# Altium PCB H16R7x.PcbDoc (part 2 of 2)
Units mil, origin at the board's own origin, x right, y up, seen from the top; angles counter-clockwise.
Board outline 2362.2 x 1363.78 mil, 2 copper layers (Top Layer, Bottom Layer); 49 components, 30 nets, 132 pads, 0 vias.
Unrouted connection lines stored in the file: 81.
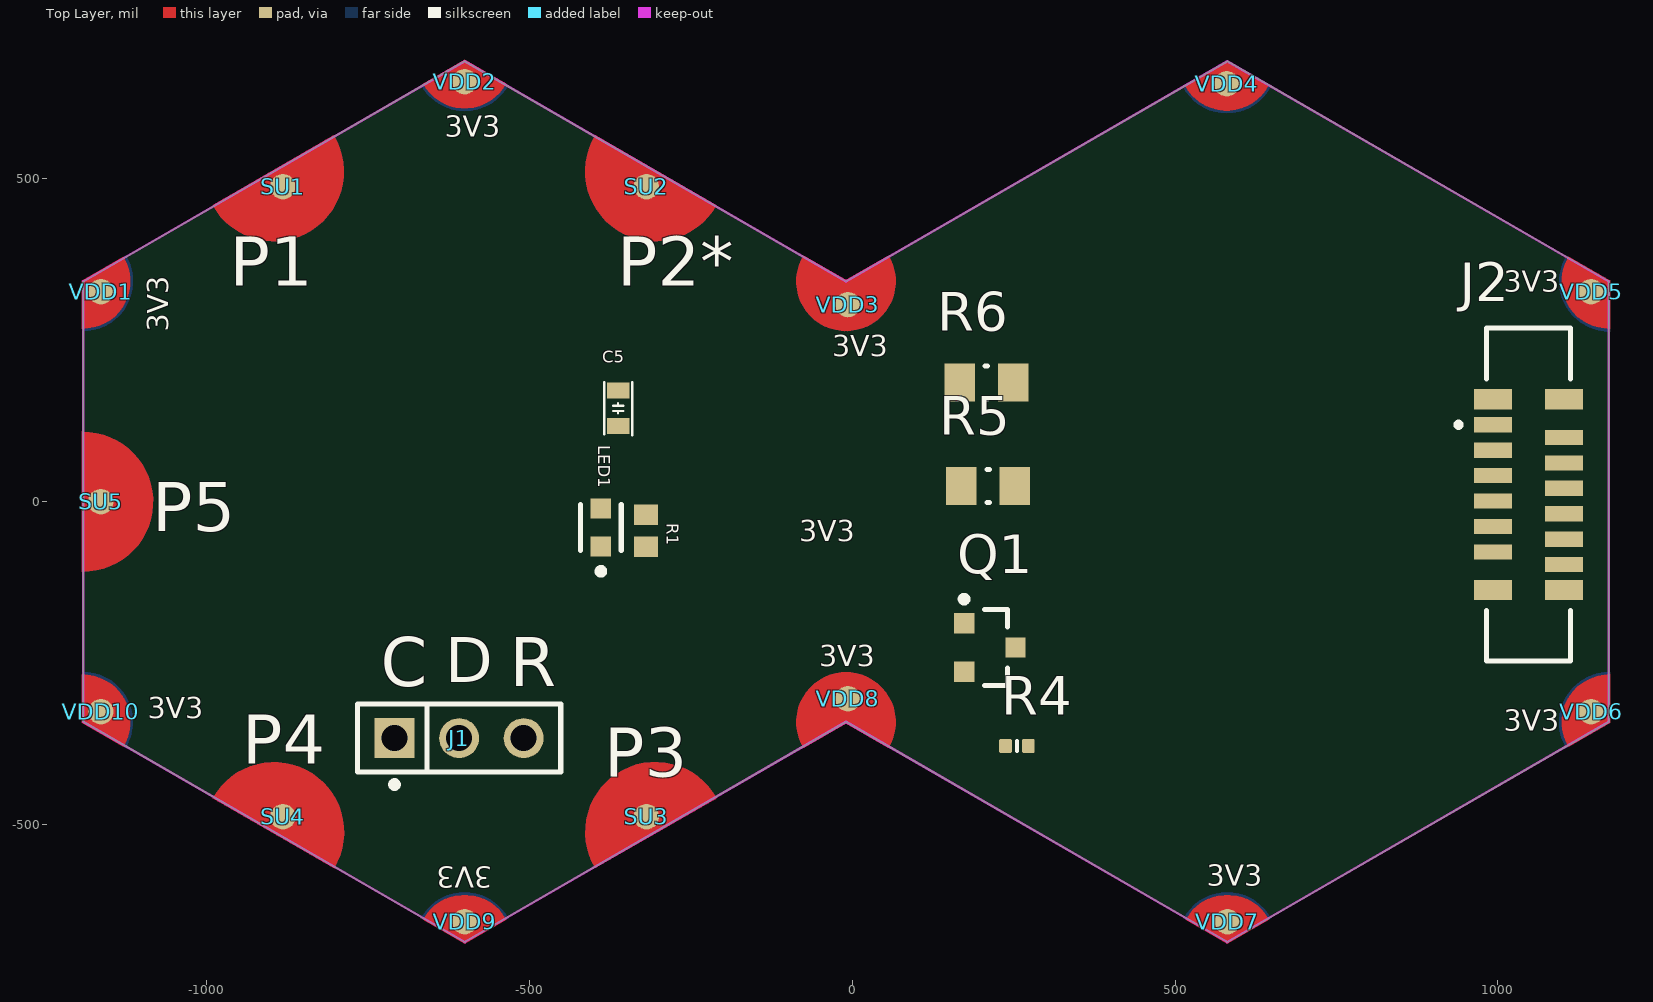
[diagram p0: Top Layer view]

## Part data (continued)
U1: "MCU 32-bit ARM Cortex M0+ RISC 512KB Flash 1.8V/2.5V/3.3V 48-Pin UFQFPN EP Tray", Manufacturer=STMicroelectronics, Supplier Part Number=497-STM32G0B1CEU6-ND, Category=Microcontrollers, Library=Hexabitz, Manufacturer Part Number=STM32G0B1CEU6, Pricing="1=4.78, 10=3.635, 25=3.3488, 100=3.0347, 260=2.87923, 520=2.7899, 1040=2.71638, 2600=2.63877 (USD)", RoHS=Yes, Stock=4305, Supplier=Digikey, Supplier 1=Digikey, Supplier Part Number 1=497-STM32G0B1CEU6-ND
VDD1 VDD2 VDD4 VDD5 VDD6 VDD7 VDD9 VDD10: library part HEXABIT_POWER_PORT_U
VDD3: library part HEXABIT_POWER_PORT_U_300R
VDD8: library part HEXABIT_POWER_PORT_U_300L
X1: "Ceramic Resonator 8MHz ±0.5% (Tol) ±0.2% (Stability) 10pF 40Ohm 3-Pin CSMD T/R", Case Code (Imperial)=1206, Case Code (Metric)=3216, Frequency=8MHz, Frequency Stability=0.2%, Frequency Tolerance=0.5%, Load Capacitance=10pF, Manufacturer=Murata, Max Operating Temperature=125°C, Min Operating Temperature=-40°C, Package Quantity=1, Case/Package=1206, Category=Capacitors, Contact Plating=Gold, Height=0.031inch, Impedance=40R, Length=3.2mm, Library=Hexabitz, Manufacturer Part Number=CSTCE8M00G52Z-R0, Mounting Technology="Surface Mount", Packaging="Tape and Reel", Pins=3, RoHS Compliant=Yes, Self Resonant Frequency=8MHz, Series=CERALOCK®, Termination=SMD/SMT, Tolerance=0.5%, Width=1.3mm

## Nets (pads, with @x,y where several pads share a name; then routed paths per layer and width w, separated by ;. In a path a pad name is that pad's centre, name@x,y a point inside that pad or via, vN(x,y) a via of type N, cw(c..) or ccw(c..) an arc to the next point about the centre after c; other vN are vias at no path point)
"3.3 V": J2.3 J2.4
CLK_BOOT: J1.1 R3.1 U1.36
DATA: J1.2 U1.35
GND: C5.1 D1.1 GND1.Pwr_D GND2.Pwr_D GND3.Pwr_D GND4.Pwr_D GND5.Pwr_D GND6.Pwr_D GND7.Pwr_D GND8.Pwr_D GND9.Pwr_D GND10.Pwr_D J2.1 J2.5 J2.6 J2.12 J2.S1 J2.S2 J2.S3 J2.S4 Q1.2 R1.1 R2.1 R3.2 U1.21 U1.22 U1.23 U1.24 X1.P$2
NetJ2_2: J2.2 R6.2
NetJ2_7: J2.7 U1.20
NetJ2_8: J2.8 LED1.2 U1.19
NetJ2_9: J2.9 U1.16
NetJ2_10: J2.10 U1.18
NetJ2_11: J2.11 U1.28
NetLED1_1: LED1.1 R1.2
NetQ1_1: Q1.1 R4.1
NetQ1_3: Q1.3 R5.1
NetR5_2: R5.2 R6.1
NetU1_8: U1.8 X1.P$3
NetU1_9: U1.9 X1.P$1
NRST: C5.2 J1.3 U1.10
UART1_RX: SD3.UART_D U1.32
UART1_TX: SU3.UART_U U1.29
UART2_RX: SD2.UART_D U1.14
UART2_TX: SU2.UART_U U1.13
UART3_RX: SD5.UART_D U1.48
UART3_TX: SU5.UART_U U1.47
UART4_RX: SD1.UART_D U1.12
UART4_TX: SU1.UART_U U1.11
UART5_RX: SD4.UART_D U1.41
UART5_TX: SU4.UART_U U1.42
VDD: D1.2 FB1.1 R4.2 VDD1.Pwr_U VDD2.Pwr_U VDD3.Pwr_U VDD4.Pwr_U VDD5.Pwr_U VDD6.Pwr_U VDD7.Pwr_U VDD8.Pwr_U VDD9.Pwr_U VDD10.Pwr_U
VDDA: C1.2 C2.1 C3.2 C4.2 FB1.2 U1.4 U1.5 U1.6
VSSA: C1.1 C2.2 C3.1 C4.1 R2.2 U1.7
pads on no net: U1.1 U1.2 U1.3 U1.15 U1.17 U1.25 U1.26 U1.27 U1.30 U1.31 U1.33 U1.34 U1.37 U1.38 U1.39 U1.40 U1.43 U1.44 U1.45 U1.46 U1.49

## Keep-outs
Keep-Out Layer:
  the board outline again, w3.94

## Silkscreen, mask and mechanical layers (free items; w line width, h text height)
Top Overlay:
  drawing of 1337 lines, arcs and shapes, not listed
  text "3V3" at -631,565.01 h32
  text "P1" at -964,334.02 h76
  text "P2*" at -364,334.02 h76
  text "3V3" at 1009,325.01 h32
  text "3V3" at -1059.01,263 h32 r90
  text "3V3" at -31,225.01 h32
  text "P5" at -1084,-45.98 h76
  text "3V3" at -82.22,-61.32 h32
  text "3V3" at -51,-254.99 h32
  text "D" at -630,-279.99 h70
  text "C" at -730,-285.98 h76
  text "R" at -530,-285.98 h76
  text "3V3" at -1091,-334.99 h32
  text "3V3" at 1009,-354.99 h32
  text "P4" at -944,-405.98 h76
  text "P3" at -384,-425.98 h76
  text "3V3" at -557,-565.01 h32 r180
  text "3V3" at 549,-594.99 h32
Bottom Overlay:
  text "GND" at -631,594.99 h32 r180
  text "P1" at -710,414.02 h76
  text "H01R00" at 422.73,392.16 h70
  text "P2*" at -224,334.02 h76
  text "GND" at 1083,325.01 h32
  text "GND" at -1105.01,277 h32 r90
  text "GND" at -51,254.99 h32 r180
  text "GND" at -82.22,-31.33 h32 r180
  text "P5" at -984,-45.98 h76
  text "GND" at -51,-225.01 h32 r180
  text "GND" at -997,-334.99 h32
  text "GND" at 1083,-354.99 h32
  text "P4" at -824,-405.98 h76
  text "P3" at -424,-505.98 h76
  text "GND" at 549,-545.01 h32 r180
  text "GND" at -651,-565.01 h32 r180
Top Solder:
  drawing of 17 lines, arcs and shapes, not listed
Bottom Solder:
  drawing of 17 lines, arcs and shapes, not listed
Dimensions:
  lines w3.94: -3.06,-340.94 -593.61,-681.89 -1184.16,-340.94 -1184.16,340.94 -593.61,681.89 -3.06,340.94

## Text inside footprints (layer, text, board x,y; h text height)
C2: Mechanical 32 "2" at -774,266.5 h25 r270; Mechanical 32 "1" at -774,193.5 h25 r270; Mechanical 33 "C40" at -781.17,313.5 h25 r270
C4: Mechanical 32 "2" at -206.16,321.79 h25 r90; Mechanical 32 "1" at -206.16,394.79 h25 r90; Mechanical 33 "C40" at -198.99,274.79 h25 r90